# Altium PCB Protoboard 4 layer.PcbDoc
Units mil, origin at the board's own origin, x right, y up, seen from the top; angles counter-clockwise.
Board outline 2000 x 2000 mil, 4 copper layers (Component Side, Ground Plane, Power Plane, Solder Side), stack 33.234 mil thick; 61 components, 57 nets, 269 pads, 113 vias.
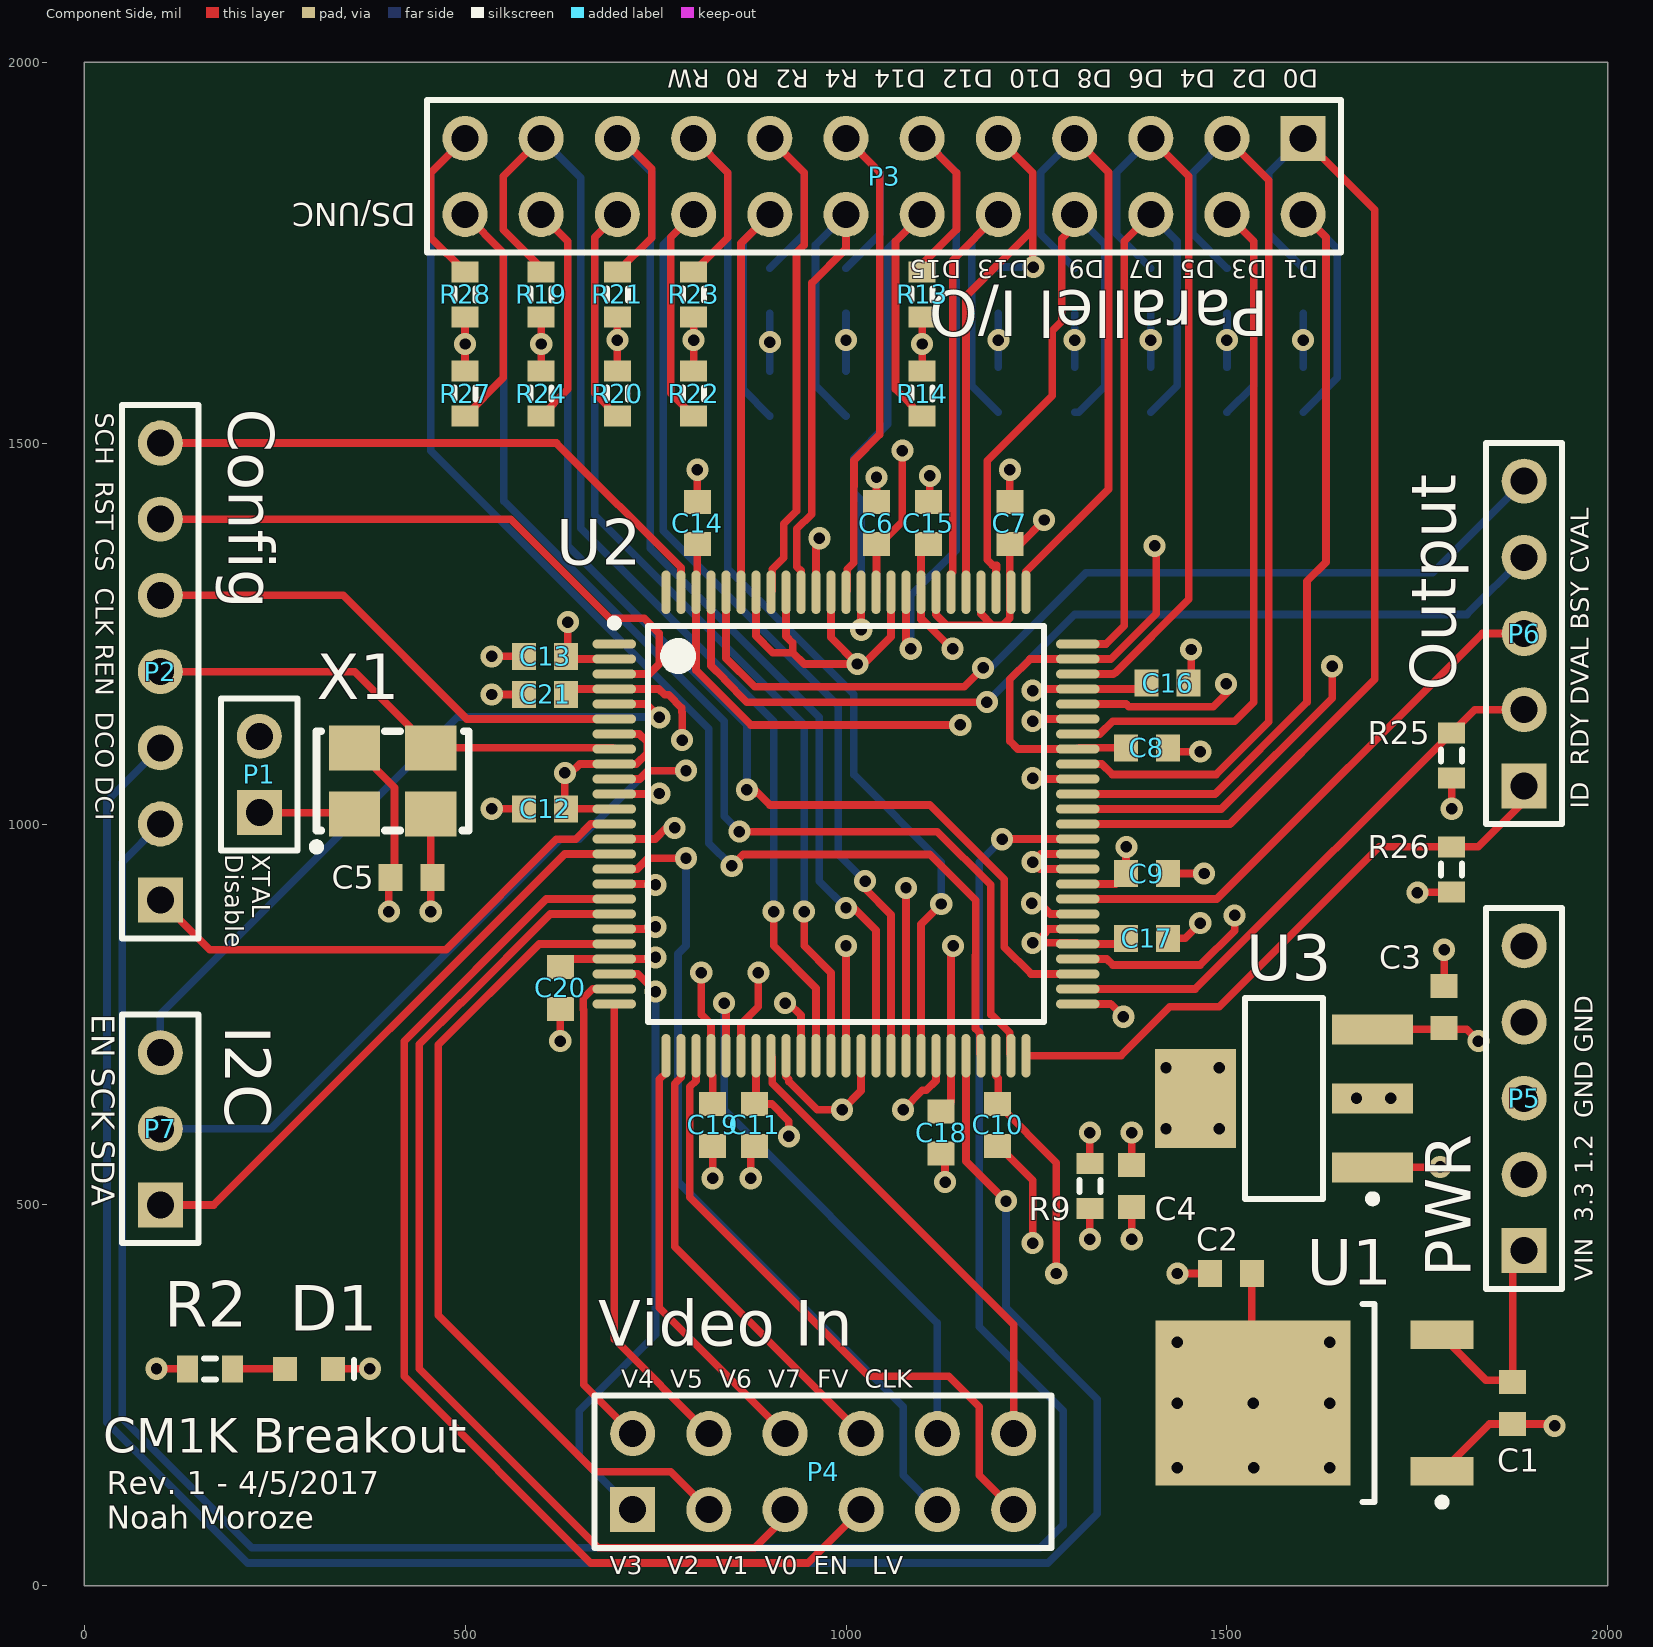
[diagram p0: Component Side view]
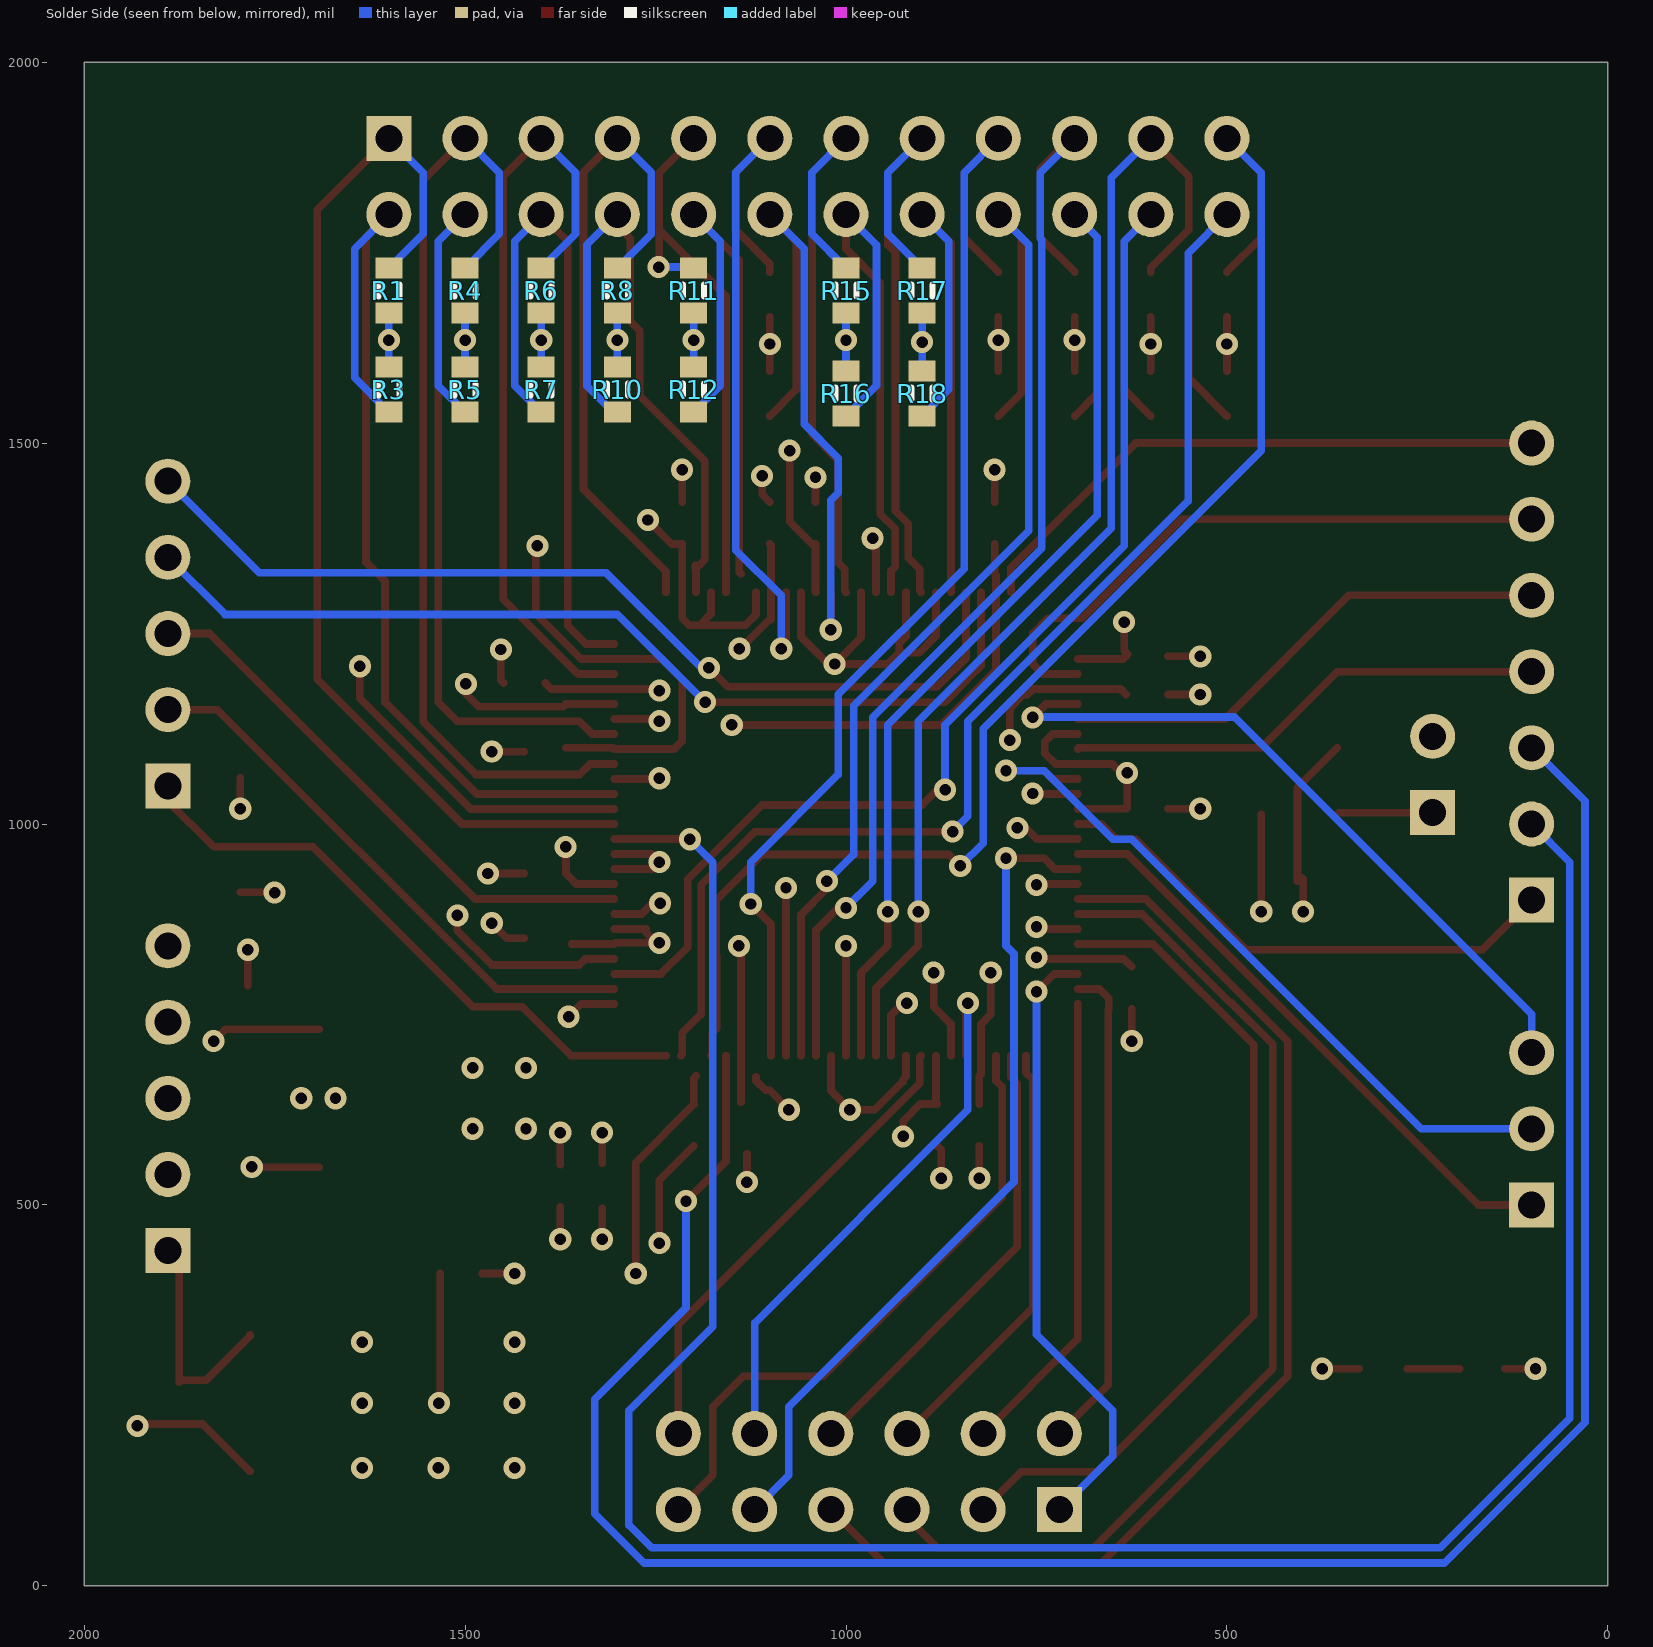
[diagram p1: Solder Side view, seen from below]
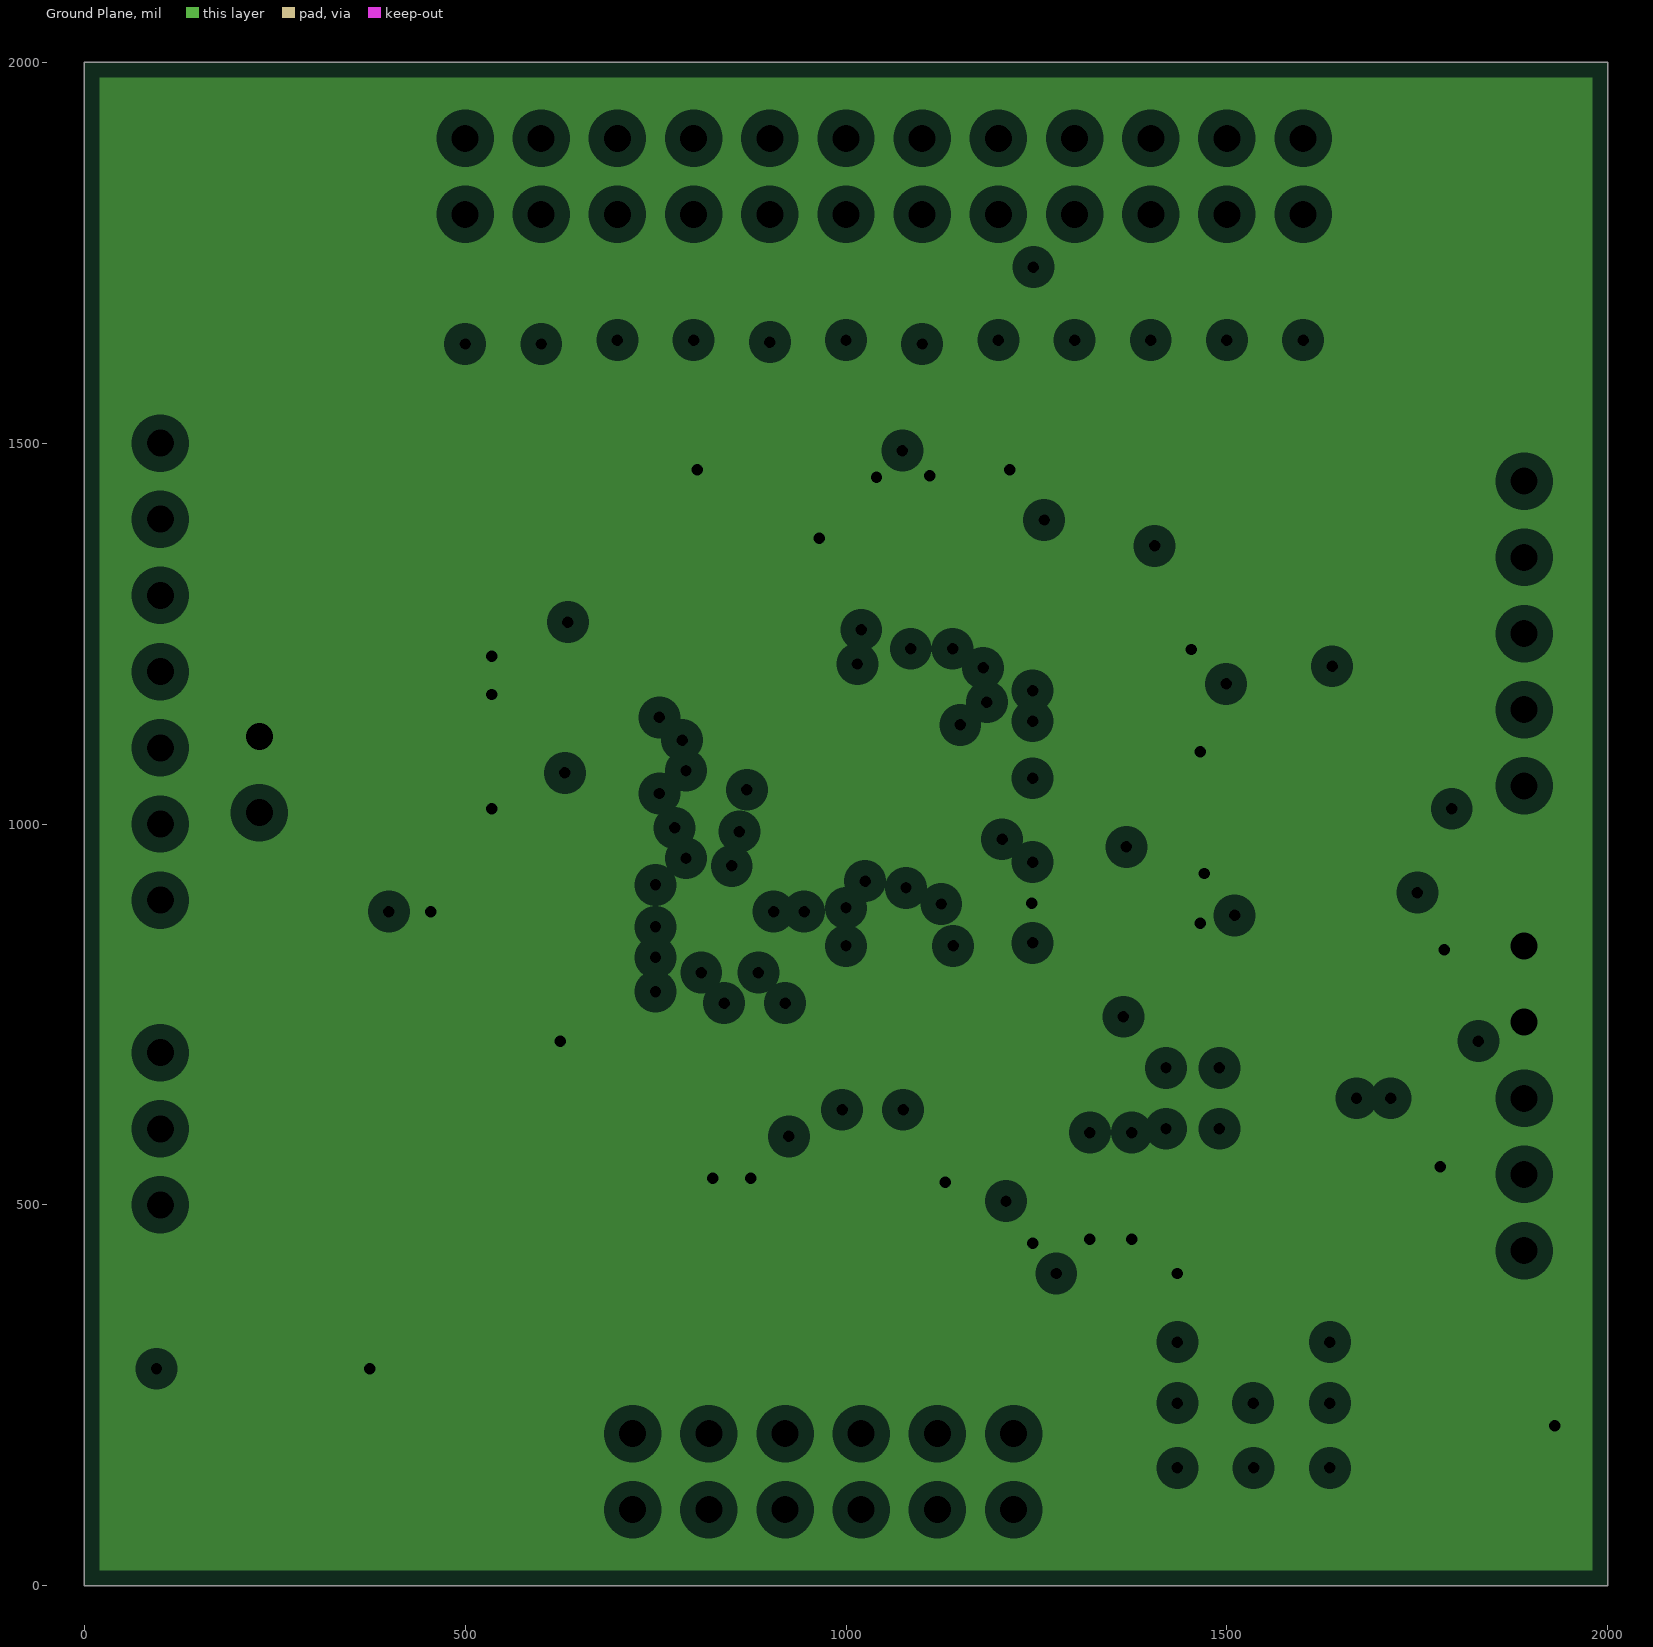
[diagram p2: Ground Plane, clearances drawn from the general rule]
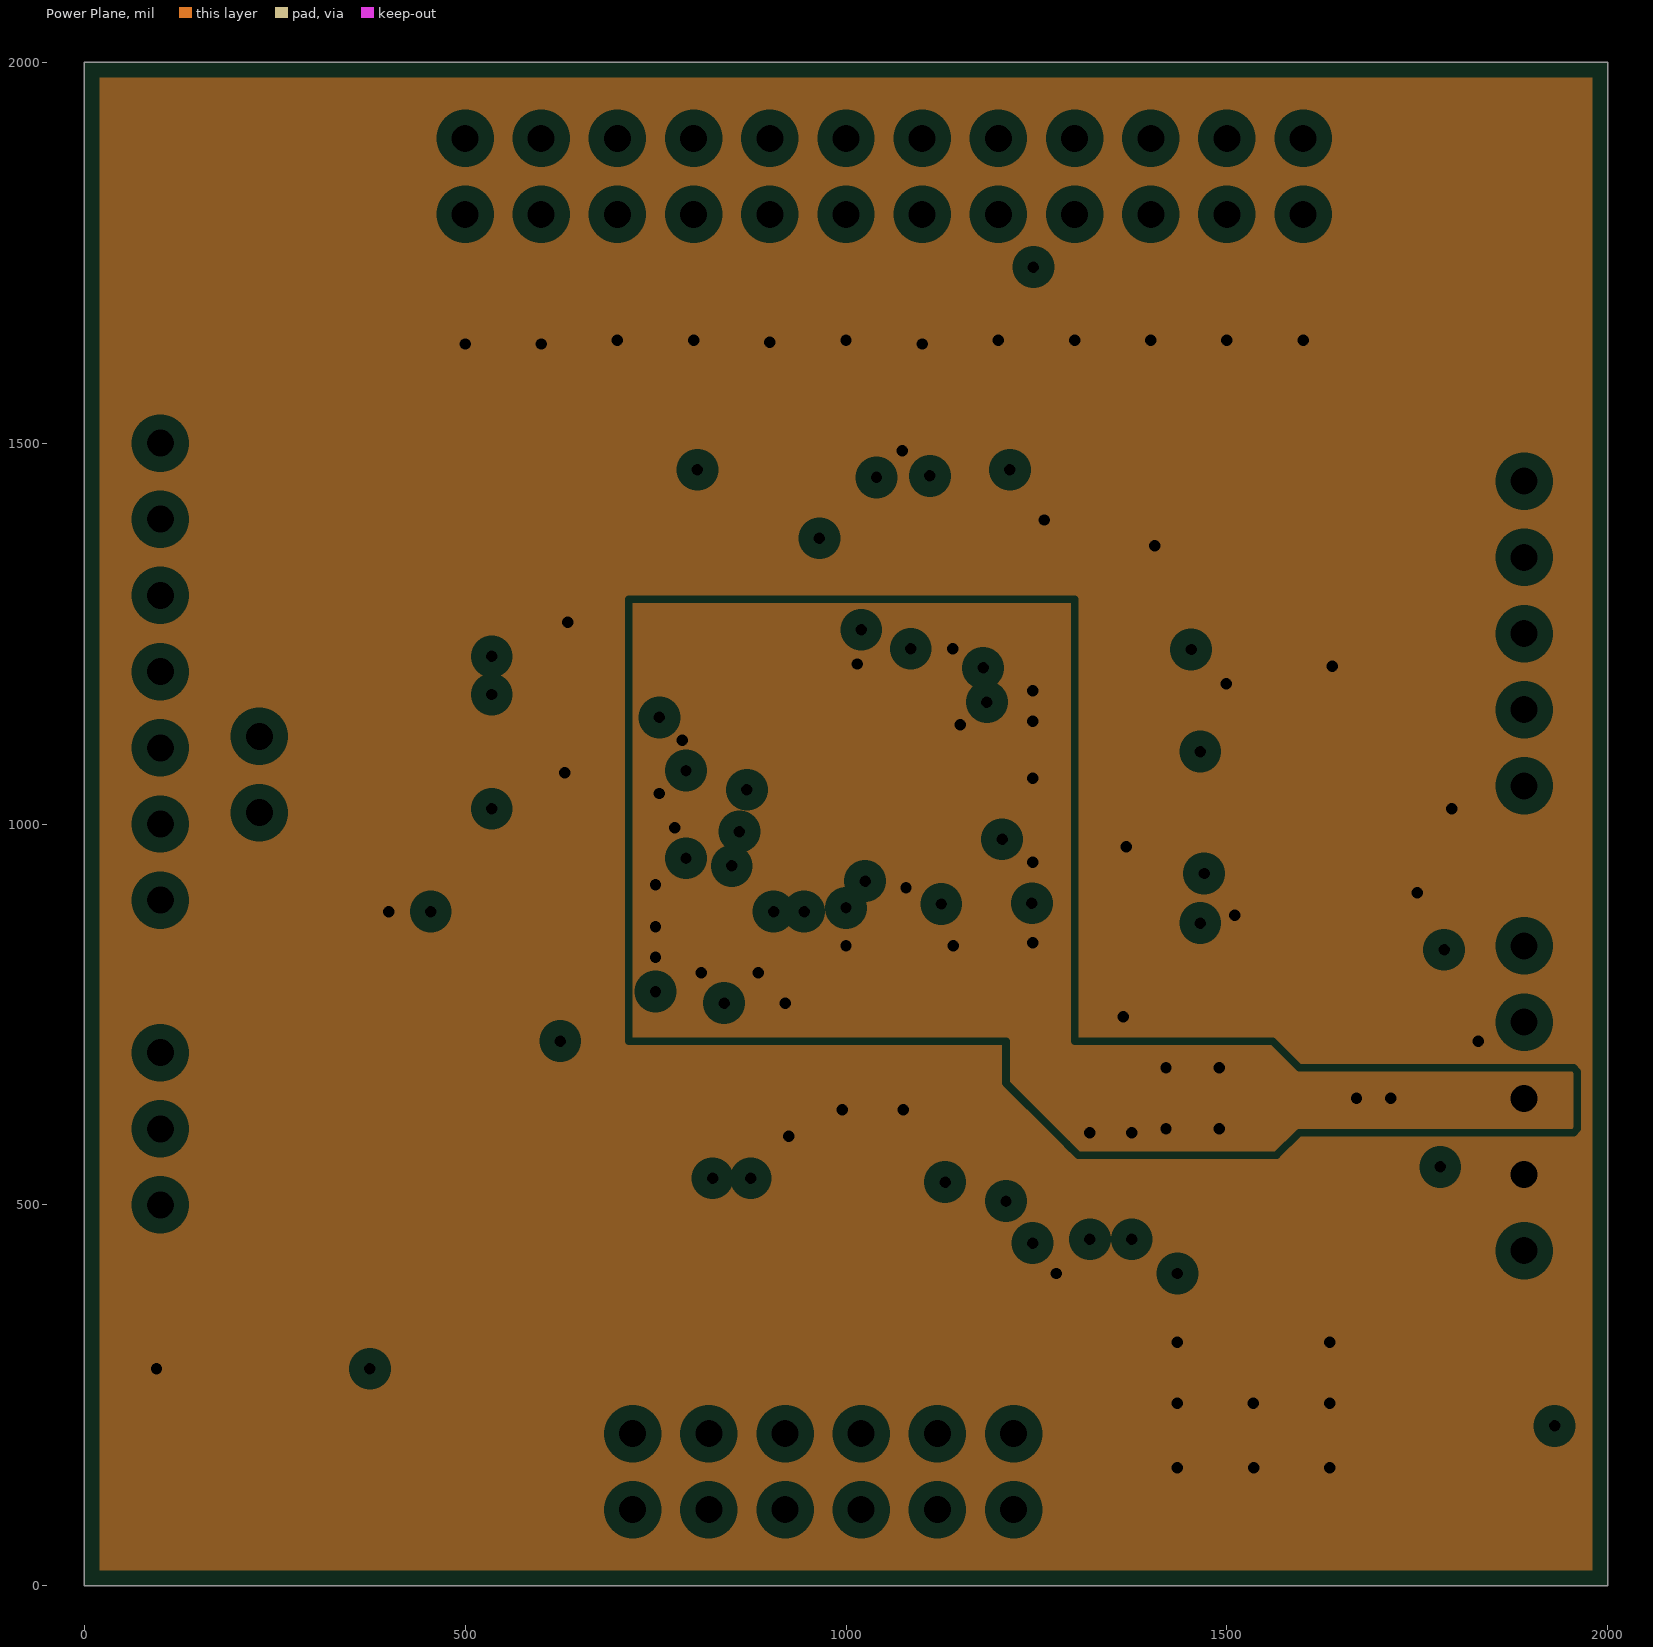
[diagram p3: Power Plane, clearances drawn from the general rule]

## Layer stack, top to bottom
Top Solder: solder mask 0.4, Solder Resist, Dk 3.5
Component Side: signal copper 1.4
Dielectric 1: core 12.6, FR-4, Dk 4.8
Ground Plane: plane copper 1.417, net GND
Dielectric 3: prepreg 5, Dk 4.2
Power Plane: plane copper 1.417, net (Multiple Nets)
Dielectric 4: core 10, Dk 4.2
Solder Side: signal copper 1.4
Bottom Solder: solder mask 0.4, Solder Resist, Dk 3.5

## Board outline
0,0 0,2000 2000,2000 2000,0

## Design rules (kind name [scope] priority, off if disabled: settings)
Clearance [All] p1: gap=10 except(6: SMDPad-SMDPad; 7: Track-Track Track-SMDPad)
PlaneClearance [All] p1: clearance=20
PlaneConnect [All] p1: planeconnectstyle=Direct reliefexpansion=20 reliefentries=4 reliefconductorwidth=10 reliefairgap=10
PolygonConnect [All] p1: connectstyle=Relief reliefconductorwidth=10 reliefentries=4 polygonreliefangle="90 Angle" airgapwidth=10
RoutingVias [All] p1: holewidth=28 width=50 viastyle="Through Hole" minholewidth=28 minwidth=50 maxholewidth=28 maxwidth=50
SolderMaskExpansion [All] p1: expansion=4
Width [All] p1: maxlimit=10 minlimit=10 preferedwidth=10
28 further rules are at their usual default settings.

## Components (designator, comment, footprint, x,y, rotation, side; value= is the part's Value field where it differs from the comment)
C1 "Cap Semi" 1608[0603] 1875,240 r90 top
C2 "Cap Semi" 1608[0603] 1505,410 r0 top
C3 "Cap Semi" 1608[0603] 1785,760 r270 top
C4 "Cap Semi" 1608[0603] 1375,525 r90 top
C5 "Cap Semi" 1608[0603] 430,930 r180 top
C6 "Cap Semi" 1608[0603] 1040,1395 r270 top
C7 "Cap Semi" 1608[0603] 1215,1395 r270 top
C8 "Cap Semi" 1608[0603] 1395,1100 r180 top
C9 "Cap Semi" 1608[0603] 1395,935 r180 top
C10 "Cap Semi" 1608[0603] 1199,605 r90 top
C11 "Cap Semi" 1608[0603] 880,605 r90 top
C12 "Cap Semi" 1608[0603] 605,1020 r0 top
C13 "Cap Semi" 1608[0603] 605,1220 r0 top
C14 "Cap Semi" 1608[0603] 805,1395 r270 top
C15 "Cap Semi" 1608[0603] 1108,1395 r270 top
C16 "Cap Semi" 1608[0603] 1422,1185 r180 top
C17 "Cap Semi" 1608[0603] 1395,850 r180 top
C18 "Cap Semi" 1608[0603] 1125,595 r90 top
C19 "Cap Semi" 1608[0603] 825,605 r90 top
C20 "Cap Semi" 1608[0603] 625,785 r90 top
C21 "Cap Semi" 1608[0603] 605,1170 r0 top
D1 "150060BS75000" 0603_A 295,285 r180 top
P1 "Header 2" HDR1X2 230,1015 r90 top
P2 "Config" HDR1X7 100,900 r90 top
P3 "Parallel I/O" HDR2X12 1600,1900 r180 top
P4 "Video In" HDR2X6 720,100 r0 top
P5 "PWR" HDR1X5 1890,440 r90 top
P6 "Output" HDR1X5 1890,1050 r90 top
P7 "I2C" HDR1X3 100,500 r90 top
R1 "Res3" J1-0603 1600,1700 r270 bottom
R2 "Res3" J1-0603 165,285 r0 top
R3 "Res3" J1-0603 1600,1570 r90 bottom
R4 "Res3" J1-0603 1500,1700 r270 bottom
R5 "Res3" J1-0603 1500,1570 r90 bottom
R6 "Res3" J1-0603 1400,1700 r270 bottom
R7 "Res3" J1-0603 1400,1570 r90 bottom
R8 "Res3" J1-0603 1300,1700 r270 bottom
R9 "Res3" J1-0603 1320,525 r90 top
R10 "Res3" J1-0603 1300,1570 r90 bottom
R11 "Res3" J1-0603 1200,1700 r270 bottom
R12 "Res3" J1-0603 1200,1570 r90 bottom
R13 "Res3" J1-0603 1100,1695 r270 top
R14 "Res3" J1-0603 1100,1565 r90 top
R15 "Res3" J1-0603 1000,1700 r270 bottom
R16 "Res3" J1-0603 1000,1565 r90 bottom
R17 "Res3" J1-0603 900,1700 r270 bottom
R18 "Res3" J1-0603 900,1565 r90 bottom
R19 "Res3" J1-0603 600,1695 r270 top
R20 "Res3" J1-0603 700,1565 r90 top
R21 "Res3" J1-0603 700,1695 r270 top
R22 "Res3" J1-0603 800,1565 r90 top
R23 "Res3" J1-0603 800,1695 r270 top
R24 "Res3" J1-0603 600,1565 r90 top
R25 "Res3" J1-0603 1795,1090 r270 top
R26 "Res3" J1-0603 1795,940 r270 top
R27 "Res3" J1-0603 500,1565 r90 top
R28 "Res3" J1-0603 500,1695 r270 top
U1 "LD1117DT33TR" TO-252_N 1615,240 r180 top
U2 "CM1K" TSQFP50P1600X1600X120-100N 1000,1000 r0 top locked
U3 "LD1117S12TR" SOT-223_M 1575,640 r180 top
X1 "ASFL1-27.000MHZ-EK-T" Oscillator 355,1100 r0 top

## Footprints (in the part's own frame and the unit in brackets; to place one, negate y for a bottom-side part, rotate by r counter-clockwise, add the part's x,y. Pads: shape width x height; smd on the part's side, far side on the other; paste and mask are expansions set on the pad)
0603_A [mm] "Chip LED, 2-Leads, Body 1.6x0.8mm, IPC Medium Density"
  rect 0.8x0.8 smd: 1(-0.8,0) 2(0.8,0)
  silkscreen extent -1.5,-0.3 -1.5,0.3, body extent -0.8,-0.4 0.8,0.4, height 0.7
1608[0603] [mm] "Chip Capacitor, Body 1.6x0.8mm, IPC High Density"
  rect 0.8x0.9 smd: 1(-0.7,0) 2(0.7,0)
  body extent -0.87,-0.48 0.87,0.48, height 1.3
HDR1X2 [mm] "Connector; Header; 2 Position"
  rect 1.5x1.5 hole 0.9: 1(0,0)
  round 1.5 hole 0.9: 2(2.54,0)
  silkscreen extent -1.27,-1.27 3.81,1.27
HDR1X3 [mm] "Connector; Header; 3 Position"
  rect 1.5x1.5 hole 0.9: 1(0,0)
  round 1.5 hole 0.9: 2(2.54,0) 3(5.08,0)
  silkscreen extent -1.27,-1.27 6.35,1.27
HDR1X5 [mm] "Connector; Header; 5 Position"
  rect 1.5x1.5 hole 0.9: 1(0,0)
  round 1.5 hole 0.9: 2(2.54,0) 3(5.08,0) 4(7.62,0) 5(10.16,0)
  silkscreen extent -1.27,-1.27 11.43,1.27
HDR1X7 [mm] "Connector; Header; 7 Position"
  rect 1.5x1.5 hole 0.9: 1(0,0)
  round 1.5 hole 0.9: 2(2.54,0) 3(5.08,0) 4(7.62,0) 5(10.16,0) 6(12.7,0) 7(15.24,0)
  silkscreen extent -1.27,-1.27 16.51,1.27
HDR2X6 [mm] "Connector; Header; 6x2 Position"
  rect 1.5x1.5 hole 0.9: 1(0,0)
  round 1.5 hole 0.9: 2(0,2.54) 3(2.54,0) 4(2.54,2.54) 5(5.08,0) 6(5.08,2.54) 7(7.62,0) 8(7.62,2.54) 9(10.16,0) 10(10.16,2.54) 11(12.7,0) 12(12.7,2.54)
  silkscreen extent -1.27,-1.27 13.97,3.81
HDR2X12 [mm] "Connector; Header; 12x2 Position"
  rect 1.5x1.5 hole 0.9: 1(0,0)
  round 1.5 hole 0.9: 2(0,2.54) 3(2.54,0) 4(2.54,2.54) 5(5.08,0) 6(5.08,2.54) 7(7.62,0) 8(7.62,2.54) 9(10.16,0) 10(10.16,2.54) 11(12.7,0) 12(12.7,2.54) 13(15.24,0) 14(15.24,2.54) 15(17.78,0) 16(17.78,2.54) 17(20.32,0) 18(20.32,2.54) 19(22.86,0) 20(22.86,2.54) 21(25.4,0) 22(25.4,2.54) 23(27.94,0) 24(27.94,2.54)
  silkscreen extent -1.27,-1.27 29.21,3.81
J1-0603 [mm] "Chip Resistor, Body 1.6x0.8mm, IPC High Density"
  rect 0.7x0.9 smd: 1(-0.75,0) 2(0.75,0)
  silkscreen extent -0.2,-0.35 0.2,0.35, body extent -0.85,-0.48 0.85,0.48, height 0.9
Oscillator [mil]
  rect 67x59 smd: 1(0,-87) 2(100,-87) 3(100,0) 4(0,0)
  silkscreen extent -55,-135 150,22
SOT-223_M [mm] "SOT223, 4-Leads, Body 6.5x3.5mm, Pitch 2.3mm, Lead Span 7mm, IPC Low Density"
  rect 2.7x1 smd: 1(-2.95,2.3) 2(-2.95,0) 3(-2.95,-2.3)
  rect 2.7x3.3 smd: 4(2.95,0)
  silkscreen extent -3.08,-3.35 1.3,3.47, body extent -1.85,-3.35 1.85,3.35, height 1.8
TO-252_N [mm] "D-PAK, 4-Leads, Body 6.1x6.5mm, Pitch 2.28mm, Lead Span 9.7mm, IPC Medium Density"
  rect 2.1x0.95 smd: 1(-4.25,2.28) 3(-4.25,-2.28)
  rect 6.5x5.5 smd: 4(2.05,0)
  silkscreen extent -4.38,-3.3 -1.6,3.43, body extent -2,-3.3 4.2,3.3, height 2.4
TSQFP50P1600X1600X120-100N [mm] "TSQFP, 100-Leads, Body 14.00x14.00mm, Pitch 0.50mm, IPC Medium Density"
  oval 1.45x0.3 smd: 1(-7.725,6) 2(-7.725,5.5) 3(-7.725,5) 4(-7.725,4.5) 5(-7.725,4) 6(-7.725,3.5) 7(-7.725,3) 8(-7.725,2.5) 9(-7.725,2) 10(-7.725,1.5) 11(-7.725,1) 12(-7.725,0.5) 13(-7.725,0) 14(-7.725,-0.5) 15(-7.725,-1) 16(-7.725,-1.5) 17(-7.725,-2) 18(-7.725,-2.5) 19(-7.725,-3) 20(-7.725,-3.5) 21(-7.725,-4) 22(-7.725,-4.5) 23(-7.725,-5) 24(-7.725,-5.5) 25(-7.725,-6) 51(7.725,-6) 52(7.725,-5.5) 53(7.725,-5) 54(7.725,-4.5) 55(7.725,-4) 56(7.725,-3.5) 57(7.725,-3) 58(7.725,-2.5) 59(7.725,-2) 60(7.725,-1.5) 61(7.725,-1) 62(7.725,-0.5) 63(7.725,0) 64(7.725,0.5) 65(7.725,1) 66(7.725,1.5) 67(7.725,2) 68(7.725,2.5) 69(7.725,3) 70(7.725,3.5) 71(7.725,4) 72(7.725,4.5) 73(7.725,5) 74(7.725,5.5) 75(7.725,6)
  oval 0.3x1.45 smd: 26(-6,-7.725) 27(-5.5,-7.725) 28(-5,-7.725) 29(-4.5,-7.725) 30(-4,-7.725) 31(-3.5,-7.725) 32(-3,-7.725) 33(-2.5,-7.725) 34(-2,-7.725) 35(-1.5,-7.725) 36(-1,-7.725) 37(-0.5,-7.725) 38(0,-7.725) 39(0.5,-7.725) 40(1,-7.725) 41(1.5,-7.725) 42(2,-7.725) 43(2.5,-7.725) 44(3,-7.725) 45(3.5,-7.725) 46(4,-7.725) 47(4.5,-7.725) 48(5,-7.725) 49(5.5,-7.725) 50(6,-7.725) 76(6,7.725) 77(5.5,7.725) 78(5,7.725) 79(4.5,7.725) 80(4,7.725) 81(3.5,7.725) 82(3,7.725) 83(2.5,7.725) 84(2,7.725) 85(1.5,7.725) 86(1,7.725) 87(0.5,7.725) 88(0,7.725) 89(-0.5,7.725) 90(-1,7.725) 91(-1.5,7.725) 92(-2,7.725) 93(-2.5,7.725) 94(-3,7.725) 95(-3.5,7.725) 96(-4,7.725) 97(-4.5,7.725) 98(-5,7.725) 99(-5.5,7.725) 100(-6,7.725)
  silkscreen extent -7.85,-6.6 6.6,6.82, body extent -8,-8 8,8, height 1.2

## Part data
C1 C2 C3 C4 C5 C6 C7 C8 C9 C10 C11 C12 C13 C14 C15 C16 C17 C18 C19 C20 C21: "Capacitor (Semiconductor SIM Model)"
D1: library part CMP-1426-00003-1, "SMD mono-color Chip LED, WL-SMCW, Blue"
P1: "Header, 2-Pin"
P2: library part "Header 7", "Header, 7-Pin"
P3: library part "Header 12X2", "Header, 12-Pin, Dual row"
P4: library part "Header 6X2", "Header, 6-Pin, Dual row"
P5 P6: library part "Header 5", "Header, 5-Pin"
P7: library part "Header 3", "Header, 3-Pin"
R1 R2 R3 R4 R5 R6 R7 R8 R9 R10 R11 R12 R13 R14 R15 R16 R17 R18 R19 R20 R21 R22 R23 R24 R25 R26 R27 R28: "Resistor"
U1: library part CMP-0244-00088-1, "Fixed Low Drop Positive Voltage Regulator, 3.3V, 3-Pin DPAK, Tape and Reel"
U3: library part CMP-0244-00318-1, "Fixed Low Drop Positive Voltage Regulator, 1.2V, 4-Pin SOT-223, Tape and Reel"
X1: library part Component_1

## Via types
v1: diameter 29, hole 15, Component Side to Solder Side, 113 vias

## Nets (pads, with @x,y where several pads share a name; then routed paths per layer and width w, separated by ;. In a path a pad name is that pad's centre, name@x,y a point inside that pad or via, vN(x,y) a via of type N, cw(c..) or ccw(c..) an arc to the next point about the centre after c; other vN are vias at no path point)
1.2V: C4.2 C14.2 C15.2 C16.2 C17.2 C18.2 C19.2 C20.2 C21.2 P5.3 R9.2 U2.4 U2.11 U2.14 U2.17 U2.20 U2.22 U2.29 U2.31 U2.35 U2.38 U2.42 U2.45 U2.55 U2.56 U2.60 U2.61 U2.66 U2.70 U2.72 U2.83 U2.85 U2.89 U2.92 U2.94 U2.98 U3.2 U3.4 | length 3424.5
  Component Side w10: C20.2 635.28,822.83 U2.22 747.83,822.83 v1(750,825) ; C21.2 639.72,1177.17 U2.4 754.33,1177.17 762,1169.5 767.22,1169.5 784.5,1152.22 784.5,1147 785,1146.5 v1(785,1110) ; U2.20 747.2,862.2 v1(750,865) ; U2.17 748.74,921.26 v1(750,920) ; U2.14 749.68,980.32 764.37,995 v1(775,995) ; U2.11 754.37,1039.37 v1(755,1040) ; C14.2 805,1328.36 803.15,1326.51 U2.98 803.15,1201.85 875,1130 v1(1150,1130) ; v1(810,805) 810,750 822.83,737.17 U2.29 822.83,671.7 825,669.53 C19.2 ; U2.31 862.2,737.2 885,760 v1(885,805) ; U2.94 881.89,1246.89 903.78,1225 930,1225 ; v1(920,765) 925,765 940.94,749.06 U2.35 ; U2.92 921.26,1246.26 930,1237.52 930,1225 ; U2.89 980.31,1245.31 980,1245 v1(1015,1210) ; U2.38 v1(1000,840) ; U2.85 1059.06,1245.94 1023.11,1210 v1(1015,1210) ; U2.42 v1(1078.74,916.26) ; C15.2@1100,1367.44 1098.43,1365.87 U2.83 1098.43,1268.43 1099.5,1269.5 1139,1230 v1(1140,1230) ; C18.2@1137.8,634.76 U2.45 1137.8,837.2 v1(1140.59,840) ; v1(1245,1060) 1245.94,1059.06 U2.66 ; v1(1245,1135) 1247.8,1137.8 U2.70 ; v1(1245,1175) 1247.17,1177.17 U2.72 1386.61,1177.17 C16.2 ; U2.56 1262.2,862.2 1262.2,857.24 1248.96,844 v1(1245,844) 1302.65,844 U2.55 C17.2@1359.96,842.52 ; U2.60 1254.06,940.94 v1(1245,950) 1255.63,960.63 U2.61 ; R9.2 v1(1320,595) ; C4.2 v1(1375,595) ; 930,1225 945,1210 v1(1015,1210)
  other v1: 1420,600 1490,600 1670,640 1715,640 1420,680 1490,680
3.3V: C2.2 C3.2 C5.2 C6.2 C7.2 C8.2 C9.2 C10.2 C11.2 C12.2 C13.2 P5.2 R1.2 R2.1 R3.2 R4.2 R5.2 R6.2 R7.2 R8.2 R10.2 R11.2 R12.2 R13.2 R14.2 R15.2 R16.2 R17.2 R18.2 R19.2 R20.2 R21.2 R22.2 R23.2 R24.2 R25.2 R26.2 R27.2 R28.2 U1.4 U2.2 U2.7 U2.9 U2.12 U2.32 U2.34 U2.39 U2.44 U2.48 U2.51 U2.54 U2.59 U2.64 U2.68 U2.71 U2.74 U2.77 U2.79 U2.82 U2.86 U3.3 X1.4 | length 4811.4
  Component Side w10: v1(95,285) R2.1 ; X1.4 407.44,1047.56 C5.2@407.44,925 ; v1(400,885) 400,927.56 C5.2 ; R27.2 R28.2 ; R24.2 R19.2 ; v1(635,1265) 635,1227.56 630,1222.56 C13.2 636.02,1216.54 U2.2 ; U2.12 695.55,1020 C12.2 631,1021.56 v1(631,1067) 639,1067 650.74,1078.74 U2.9 724.7,1078.74 739,1093.04 739,1108 728.89,1118.11 U2.7 ; R20.2 R21.2 ; R22.2 R23.2 ; U2.32 881.89,634.45 C11.2 902.44,632.56 925,610 v1(925,590) ; U2.34 921.26,668.88 924.94,665.2 924.94,662.1 962.04,625 v1(995,625) 1019.68,649.68 U2.39 ; U2.86 1040,1304.76 C6.2 1044.44,1367.44 1074,1397 v1(1074,1490) ; v1(1075,625) 1100.31,650.31 1105.31,650.31 1118.11,663.11 U2.44@1118.11,668.11 ; R14.2 R13.2 ; U2.82 1118.11,1274.93 1132.04,1261 1192,1261 ; U2.79 1177.17,1275.83 1192,1261 ; U2.48@1196.85,669.51 1200,666.36 C10.2@1200,632.56 ; C10.2 1276,555.56 v1(1276,410) ; U2.77@1214.76,1305.43 U2.77@1215,1305.67 ; v1(1260,1399) 1228.44,1367.44 C7.2 U2.77@1215,1305.67 ; U2.51 1347.22,763.78 v1(1364,747) ; U2.54 1342.17,822.83 1350,815 1465,815 1510,860 v1(1510,880) ; U2.59 1353.82,921.26 C9.2@1365,932.44 ; U2.64 1492.69,1019.69 1638,1165 v1(1638,1207) ; U2.71 1367.52,1157.48 1371,1154 1482,1154 v1@1506,1178 ; C9.2 v1@1367.44,969.44 ; C8.2 1305.71,1100 U2.68 1225.57,1098.43 1215,1109 1215,1190 1241.54,1216.54 U2.74 1347.49,1216.54 1407,1276.04 1407,1363 v1(1405,1365) ; C2.2 1532.56,241.73 v1(1534.29,240) ; U3.3 1814.45,730.55 v1(1830,715) ; v1(1750,910) 1750.47,910.47 R26.2 ; v1(1795,1020) R25.2 ; 1192,1261 1206,1261 1215,1270 U2.77@1215,1305.67
  Solder Side w10: R18.2 R17.2 ; R16.2 R15.2 ; R12.2 R11.2 ; R10.2 R8.2 ; R7.2 v1(1400,1635) R6.2 ; R5.2 v1(1500,1635) R4.2 ; R3.2 R1.2
  other v1: 1435,155 1535,155 1635,155 1435,240 1635,240 1435,320 1635,320 1368,970 1499,1184 500,1630 600,1630 1100,1630 900,1632.5 700,1635 800,1635 1000,1635 1200,1635 1300,1635 1600,1635
B_BSY: P6.4 U2.97 | length 1262.4
  Component Side w10: U2.97 822.83,1207.61 840,1190.44 840,1190 870,1160 v1(1185,1160)
  Solder Side w10: v1(1185,1160) 1300,1275 1815,1275 P6.4
CAT_VAL: P6.5 U2.96 | length 1261.5
  Component Side w10: U2.96 842.52,1217.48 880,1180 1155,1180 v1(1180,1205)
  Solder Side w10: v1(1180,1205) 1190,1205 1315,1330 1770,1330 P6.5
CLK: P2.4 U2.8 X1.3 | length 637.9
  Component Side w10: P2.4 355,1200 X1.3 694.29,1100 U2.8
CS_: P2.5 U2.6 | length 663.1
  Component Side w10: P2.5 340,1300 502.2,1137.8 U2.6
DATA0: P3.1 R1.1 U2.63 | length 1425.3
  Component Side w10: U2.63 1504,1000 1694,1190 1694,1806 P3.1
  Solder Side w10: R1.1 1555,1774.53 1555,1855 P3.1
DATA1: P3.2 R3.1 U2.65 | length 1310.4
  Component Side w10: U2.65 1484.37,1039.37 1605,1160 1605,1318.75 1630,1343.75 1630,1770 P3.2
  Solder Side w10: R3.1 1645,1585.47 1645,1755 P3.2
DATA2: P3.3 R4.1 U2.67 | length 1281.6
  Component Side w10: U2.67 1335.86,1078.74 1349.61,1065 1485.96,1065 1555,1134.04 1555,1845 P3.3
  Solder Side w10: R4.1 1455,1774.53 1455,1855 P3.3
DATA3: P3.4 R5.1 U2.69 | length 1191.2
  Component Side w10: U2.69 1333.11,1118.11 1350,1135 1510,1135 1535,1160 1535,1765 P3.4
  Solder Side w10: R5.1 1535,1575.47 1535,1765 P3.4
DATA4: P3.5 R6.1 U2.73 | length 1020
  Component Side w10: U2.73 1350.86,1196.85 1352.72,1198.72 1353.72,1198.72 1450,1295 1450,1850 P3.5
  Solder Side w10: R6.1 1355,1774.53 1355,1855 P3.5
DATA5: P3.6 R7.1 U2.75 | length 913.7
  Component Side w10: U2.75 1341.22,1236.22 1365,1260 1365,1765 P3.6
  Solder Side w10: R7.1 1435,1575.47 1435,1765 P3.6
DATA6: P3.7 R8.1 U2.76 | length 866.5
  Component Side w10: U2.76 1236.22,1331.22 1344.53,1439.53 1344.53,1855.47 P3.7
  Solder Side w10: R8.1 1255.47,1774.05 1255.47,1855.47 P3.7
DATA7: P3.8 R10.1 U2.78 | length 848.3
  Component Side w10: U2.78 1196.85,1333.15 1198,1334.3 1198,1339.69 1192.31,1339.69 1185.28,1346.72 1185.28,1477 1270.5,1562.22 1270.5,1647.22 1283,1659.72 1283,1768 1300,1785 P3.8
  Solder Side w10: R10.1 1305.47,1540.47 1340,1575 1340,1760 P3.8
DATA8: P3.9 R11.1 U2.80 | length 746.8
  Component Side w10: U2.80 1157.48,1692.48 1245,1780 ; P3.9 1245,1855 1245,1780 ; v1(1246,1731) 1245,1732 1245,1780
  Solder Side w10: R11.1 1201.47,1731 v1(1246,1731)
DATA9: P3.10 R12.1 U2.81 | length 785.8
  Component Side w10: U2.81@1137.8,1328.45 1140,1330.65 1140,1740 P3.10
  Solder Side w10: R12.1 1165,1575.47 1165,1765 P3.10
DATA10: P3.11 R13.1 U2.84 | length 1002.6
  Component Side w10: U2.84 1078.74,1236.26 v1(1085,1230) ; R13.1 1100,1735 1145,1780 1145,1855 P3.11
  Solder Side w10: v1(1085,1230) 1085,1300 1144.53,1359.53 1144.53,1855.47 P3.11
DATA11: P3.12 R14.1 U2.87 | length 929.2
  Component Side w10: U2.87 1019.68,1255.32 v1(1020,1255) ; R14.1 1065,1570.47 1065,1765 P3.12
  Solder Side w10: v1(1020,1255) 1020,1425 1010,1435 1010,1480 1055,1525 1055,1755 P3.12
DATA12: P3.13 R15.1 U2.88 | length 840.5
  Component Side w10: U2.88 1001.78,1305.91 1001.78,1334.19 1010.28,1342.69 1010.28,1443.28 1010.5,1443.49 1010.5,1477.22 1044.53,1511.25 1044.53,1855.47 P3.13
  Solder Side w10: R15.1 1045,1774.53 1045,1855 P3.13
DATA13: P3.14 R16.1 U2.91 | length 822.5
  Component Side w10: U2.91 940.94,1332.41 935.5,1337.85 935.5,1387.22 955,1406.72 955,1710 1000,1755 P3.14
  Solder Side w10: R16.1 960,1575.47 960,1760 P3.14
DATA14: P3.15 R17.1 U2.93 | length 840.2
  Component Side w10: P3.15 945,1855 945,1760 935,1750 935,1410.76 918.5,1394.26 918.5,1349.33 903.35,1334.19 903.35,1305.91 U2.93
  Solder Side w10: R17.1 945,1774.53 945,1855 P3.15
DATA15: P3.16 R18.1 U2.95 | length 805
  Component Side w10: U2.95 862.2,1762.2 P3.16
  Solder Side w10: R18.1 865,1570.47 865,1765 P3.16
DCI: P2.1 U2.13 | length 691.1
  Component Side w10: P2.1 165,835 475,835 620,980 645,980 665,1000 U2.13
DCO: P2.2 U2.62 | length 3175.8
  Component Side w10: v1(1205,980) 1205.32,980.32 U2.62
  Solder Side w10: P2.2 50,950 50,220 220,50 1255,50 1285,80 1285,230 1175,340 1175,950 v1(1205,980)
DIST_VAL: P6.3 U2.58 | length 730.2
  Component Side w10: U2.58 1486.57,901.57 1835,1250 P6.3
DS_: P3.22 R24.1 U2.53 | length 1758.9
  Component Side w10: R24.1 635,1570.47 635,1765 P3.22 ; v1@880,1040 875,1045 v1(870,1045) 880,1045 900,1025 1110,1025 1207.5,927.5 1207.5,838.5 1242.85,803.15 U2.53
  Solder Side w10: P3.22 635,1765 635,1365 870,1130 v1(870,1045)
GND: C1.1 C2.1 C3.1 C4.1 C5.1 C6.1 C7.1 C8.1 C9.1 C10.1 C11.1 C12.1 C13.1 C14.1 C15.1 C16.1 C17.1 C18.1 C19.1 C20.1 C21.1 D1.1 P1.2 P5.4 P5.5 R9.1 U1.1 U2.57 U2.90 U3.1 X1.2 | length 1533.7
  Component Side w10: D1.1 v1(375,285) ; v1(455,885) X1.2 ; v1(535,1020) C12.1 ; v1(535,1170) C21.1 ; v1(535,1220) C13.1 ; v1(625,715) C20.1 ; C14.1 v1(805,1465) ; v1(825,535) C19.1 ; v1(875,535) 875,572.44 C11.1 ; U2.90 960.63,1370.63 v1(965,1375) ; C6.1 v1(1040,1455) ; C15.1@1100,1422.56 1110,1432.56 v1(1110,1457) ; v1(1130,530) C18.1@1130,567.44 ; C10.1@1200,577.44 1245,532.44 v1(1245,450) ; C7.1 v1(1215,1465) ; v1(1244,896) 1254,896 1268.11,881.89 U2.57 ; v1(1320,455) R9.1 ; v1(1375,455) C4.1 ; C17.1 1445,850 v1(1465,870) ; C9.1 v1(1470,935) ; C8.1@1422.56,1095 v1(1465,1095) ; v1(1435,410) C2.1 ; C16.1 1453,1188.44 v1(1453,1229) ; U3.1 1779.45,549.45 v1(1780,550) ; U1.1 1844.53,212.44 C1.1 1927.56,212.44 v1(1930,210) ; C3.1 v1(1785,835)
I2C_EN: P7.3 U2.5 | length 933.1
  Component Side w10: U2.5 737.52,1157.48 v1(755,1140)
  Solder Side w10: P7.3 100,750 490.5,1140.5 v1@755,1140.5
I2C_SCK: P7.2 U2.10 | length 983.3
  Component Side w10: U2.10 729.06,1059.06 740,1070 v1(790,1070)
  Solder Side w10: P7.2 245,600 625,980 650,980 740,1070 v1(790,1070)
I2C_SDA: P7.1 U2.15 | length 786.7
  Component Side w10: P7.1 170,500 630.63,960.63 U2.15
ID_: P6.1 R26.1 U2.50 | length 812.2
  Component Side w10: U2.50 1360.87,695.87 1425,760 1490,760 1700,970 1830,970 1890,1030 P6.1
NetD1_2: D1.2 R2.2 | length 69
  Component Side w10: R2.2 D1.2
NetP1_1: P1.1 X1.1 | length 125.8
  Component Side w10: P1.1 353,1015 X1.1
R_W_: P3.23 R28.1 U2.47 | length 1908.2
  Component Side w10: R28.1 455,1769.53 455,1855 P3.23 ; v1(850,945) 865,960 1110,960 1170.09,899.91 1170.09,827.78 1170,827.69 1170,731.31 1175.39,725.92 1175.39,697.65 U2.47
  Solder Side w10: P3.23 455,1855 455,1490 820,1125 820,975 v1(850,945)
RDY: P6.2 R25.1 U2.52 | length 737.7
  Component Side w10: U2.52 1458.46,783.46 1825,1150 P6.2
RECO_EN: P2.3 U2.46 | length 2989.9
  Component Side w10: U2.46 1157.48,557.52 v1(1210,505)
  Solder Side w10: P2.3 30,1030 30,215 215,30 1265,30 1330,95 1330,245 1210,365 v1(1210,505)
REG0: P3.21 R19.1 U2.36 | length 1570.4
  Component Side w10: R19.1 600,1730 550,1780 550,1850 P3.21 ; v1(905,885) 905,840 960.63,784.37 U2.36
  Solder Side w10: P3.21 652,1848 652,1388 905,1135 v1(905,885)
REG1: P3.20 R20.1 U2.37 | length 1534.5
  Component Side w10: R20.1 670,1565.47 670,1770 P3.20 ; v1(945,885) 945,840 980.31,804.69 U2.37
  Solder Side w10: P3.20 670,1770 670,1405 945,1130 v1(945,885)
REG2: P3.19 R21.1 U2.40 | length 1565
  Component Side w10: R21.1 745,1769.53 745,1860 705,1900 P3.19 ; v1@1005,895 1039.37,860.63 U2.40
  Solder Side w10: P3.19 745,1855 745,1769.04 743,1767.04 743,1362 965,1140 965,925 v1(1000,890)
REG3: P3.18 R22.1 U2.41 | length 1524
  Component Side w10: R22.1 770,1565.47 770,1770 P3.18 ; v1@1025,915 1059.06,880.94 U2.41
  Solder Side w10: P3.18 760,1760 760,1385 990,1155 990,960 v1(1025,925)
REG4: P3.17 R23.1 U2.43 | length 1562.5
  Component Side w10: R23.1 845,1769.53 845,1855 P3.17 ; U2.43 1098.43,868.43 v1(1125,895)
  Solder Side w10: P3.17 845,1855 845,1335 1010,1170 1010,1065 1125,950 v1(1125,895)
RST: P2.6 U2.3 | length 821.7
  Component Side w10: P2.6 560,1400 690,1270 735,1270 755,1250 755,1210 741.85,1196.85 U2.3
S_CHIP: P2.7 U2.99 | length 783.6
  Component Side w10: P2.7 620,1500 783.46,1336.54 U2.99
UNC_: P3.24 R27.1 U2.49 | length 1859.6
  Component Side w10: R27.1 550,1585.47 550,1750 P3.24 ; v1(860,990) 1120,990 1190,920 1190,750 1190.68,750 1214.76,725.92 1214.76,697.65 U2.49
  Solder Side w10: P3.24 551,1749 551,1424 840,1135 840,1010 v1(860,990)
V_CLK: P4.12 U2.33 | length 627.8
  Component Side w10: U2.33 903.05,694.39 903.05,659.94 1220,342.99 P4.12
V_DATA0: P4.7 U2.18 | length 1523.6
  Component Side w10: U2.18 606.57,901.57 420,715 420,275 665,30 950,30 P4.7
V_DATA1: P4.5 U2.19 | length 1356.5
  Component Side w10: U2.19 611.89,881.89 495,765 494.04,765 440,710.96 440,285 675,50 880,50 920,90 P4.5
V_DATA2: P4.3 U2.21 | length 1101.4
  Component Side w10: U2.21 597.52,842.52 465,710 465,355 670,150 770,150 P4.3
V_DATA3: P4.1 U2.23 | length 814.1
  Component Side w10: U2.23 726.85,803.15 v1(750,780)
  Solder Side w10: P4.1 650,170 650,230 750,330 v1(750,780)
V_DATA4: P4.2 U2.24 | length 643.6
  Component Side w10: U2.24 667.59,783.46 655.32,771.2 655.32,756.36 655.84,755.84 655.84,264.16 P4.2
V_DATA5: P4.4 U2.25 | length 615.2
  Component Side w10: U2.25 695.87,324.13 P4.4
V_DATA6: P4.6 U2.26 | length 567.8
  Component Side w10: U2.26 763.78,673.78 755,665 755,365 P4.6
V_DATA7: P4.8 U2.27 | length 597
  Component Side w10: 775,659.27 775,445 P4.8 ; 777.73,662.01 783.46,667.74 U2.27
V_EN: P4.9 U2.16 | length 1100.3
  Component Side w10: U2.16 725.94,940.94 740,955 v1(790,955)
  Solder Side w10: v1(790,955) 790,840 779.5,829.5 779.5,530.5 1075,235 1075,145 P4.9
V_FV: P4.10 U2.30 | length 751.2
  Component Side w10: v1(840,765) 842.52,762.48 U2.30
  Solder Side w10: v1(840,765) 840,625 1120,345 P4.10
V_LV: P4.11 U2.28 | length 836.8
  Component Side w10: U2.28 803.15,663.15 795,655 795,510 1030,275 1135,275 1175,235 1175,145 P4.11
VIN: C1.2 P5.1 U1.3 | length 298.3
  Component Side w10: U1.3 1782.32,327.68 1840,270 1872.56,270 C1.2 1875,425 P5.1
pads on no net: U2.1 U2.100

## Polygon pours and split planes (outlines as drawn)
GND on Ground Plane (split plane): 1979.9,20.1 20.1,20.1 20.1,1979.9 1979.9,1979.9
1.2V on Power Plane (split plane): 1294.9,715 1295.29,713.05 1296.4,711.4 1298.05,710.29 1300,709.9 1557.89,709.9 1591.4,676.4 1593.05,675.29 1595,674.9 1952.89,674.9 1954.9,672.89 1954.9,602.11 1952.89,600.1 1595,600.1 1593.05,599.71 1591.4,598.6 1562.89,570.1 1307.11,570.1 1296.73,580.48 1276.11,601.1 1276.1,601.1 1215.1,662.11 1215.1,715 1214.71,716.95 1213.6,718.6 1211.95,719.71 1210,720.1 720.1,720.1 720.1,1289.9 1294.9,1289.9
3.3V on Power Plane (split plane): 1979.9,20.1 20.1,20.1 20.1,1979.9 1979.9,1979.9

## Other copper
Power Plane (plane layer: these items are gaps in the copper):
  lines w10: 1290,580 1305,565 1338.75,565 1380,565 1565,565 1595,595 1955,595 1960,600 1960,675 1955,680 1595,680 1560,715 1300,715 1300,1295 715,1295 715,715 1210,715 1210,660 1272.5,597.5 1293.12,576.88

## Silkscreen, mask and mechanical layers (free items; w line width, h text height)
Top Overlay:
  text "D0  D2  D4  D6  D8  D10  D12  D14  R4  R2  R0  RW" at 1620,1990 h24 r180
  text "DS/UNC" at 435,1815 h30 r180
  text "D1  D3  D5  D7   D9     D13  D15" at 1620,1740 h24 r180
  text "SCH  RST CS  CLK REN  DCO DCI" at 15,1540 h24 r270
  text "ID  RDY DVAL BSY CVAL" at 1975,1020 h24 r90
  text "XTAL / Disable" at 185,960 h24 r270
  text "EN SCK SDA" at 10,750 h30 r270
  text "VIN  3.3 1.2  GND GND" at 1980,400 h24 r90
  text "V4  V5  V6  V7  FV  CLK" at 705,260 h24
  text "CM1K Breakout" at 25,175 h45
  text "Rev. 1 - 4/5/2017 / Noah Moroze" at 30,75 h30
  text "V3   V2  V1  V0  EN   LV" at 690,15 h24
Mechanical 1:
  the board outline again, w10